# EAGLE board COM-TC (EAGLE 8.0.1)
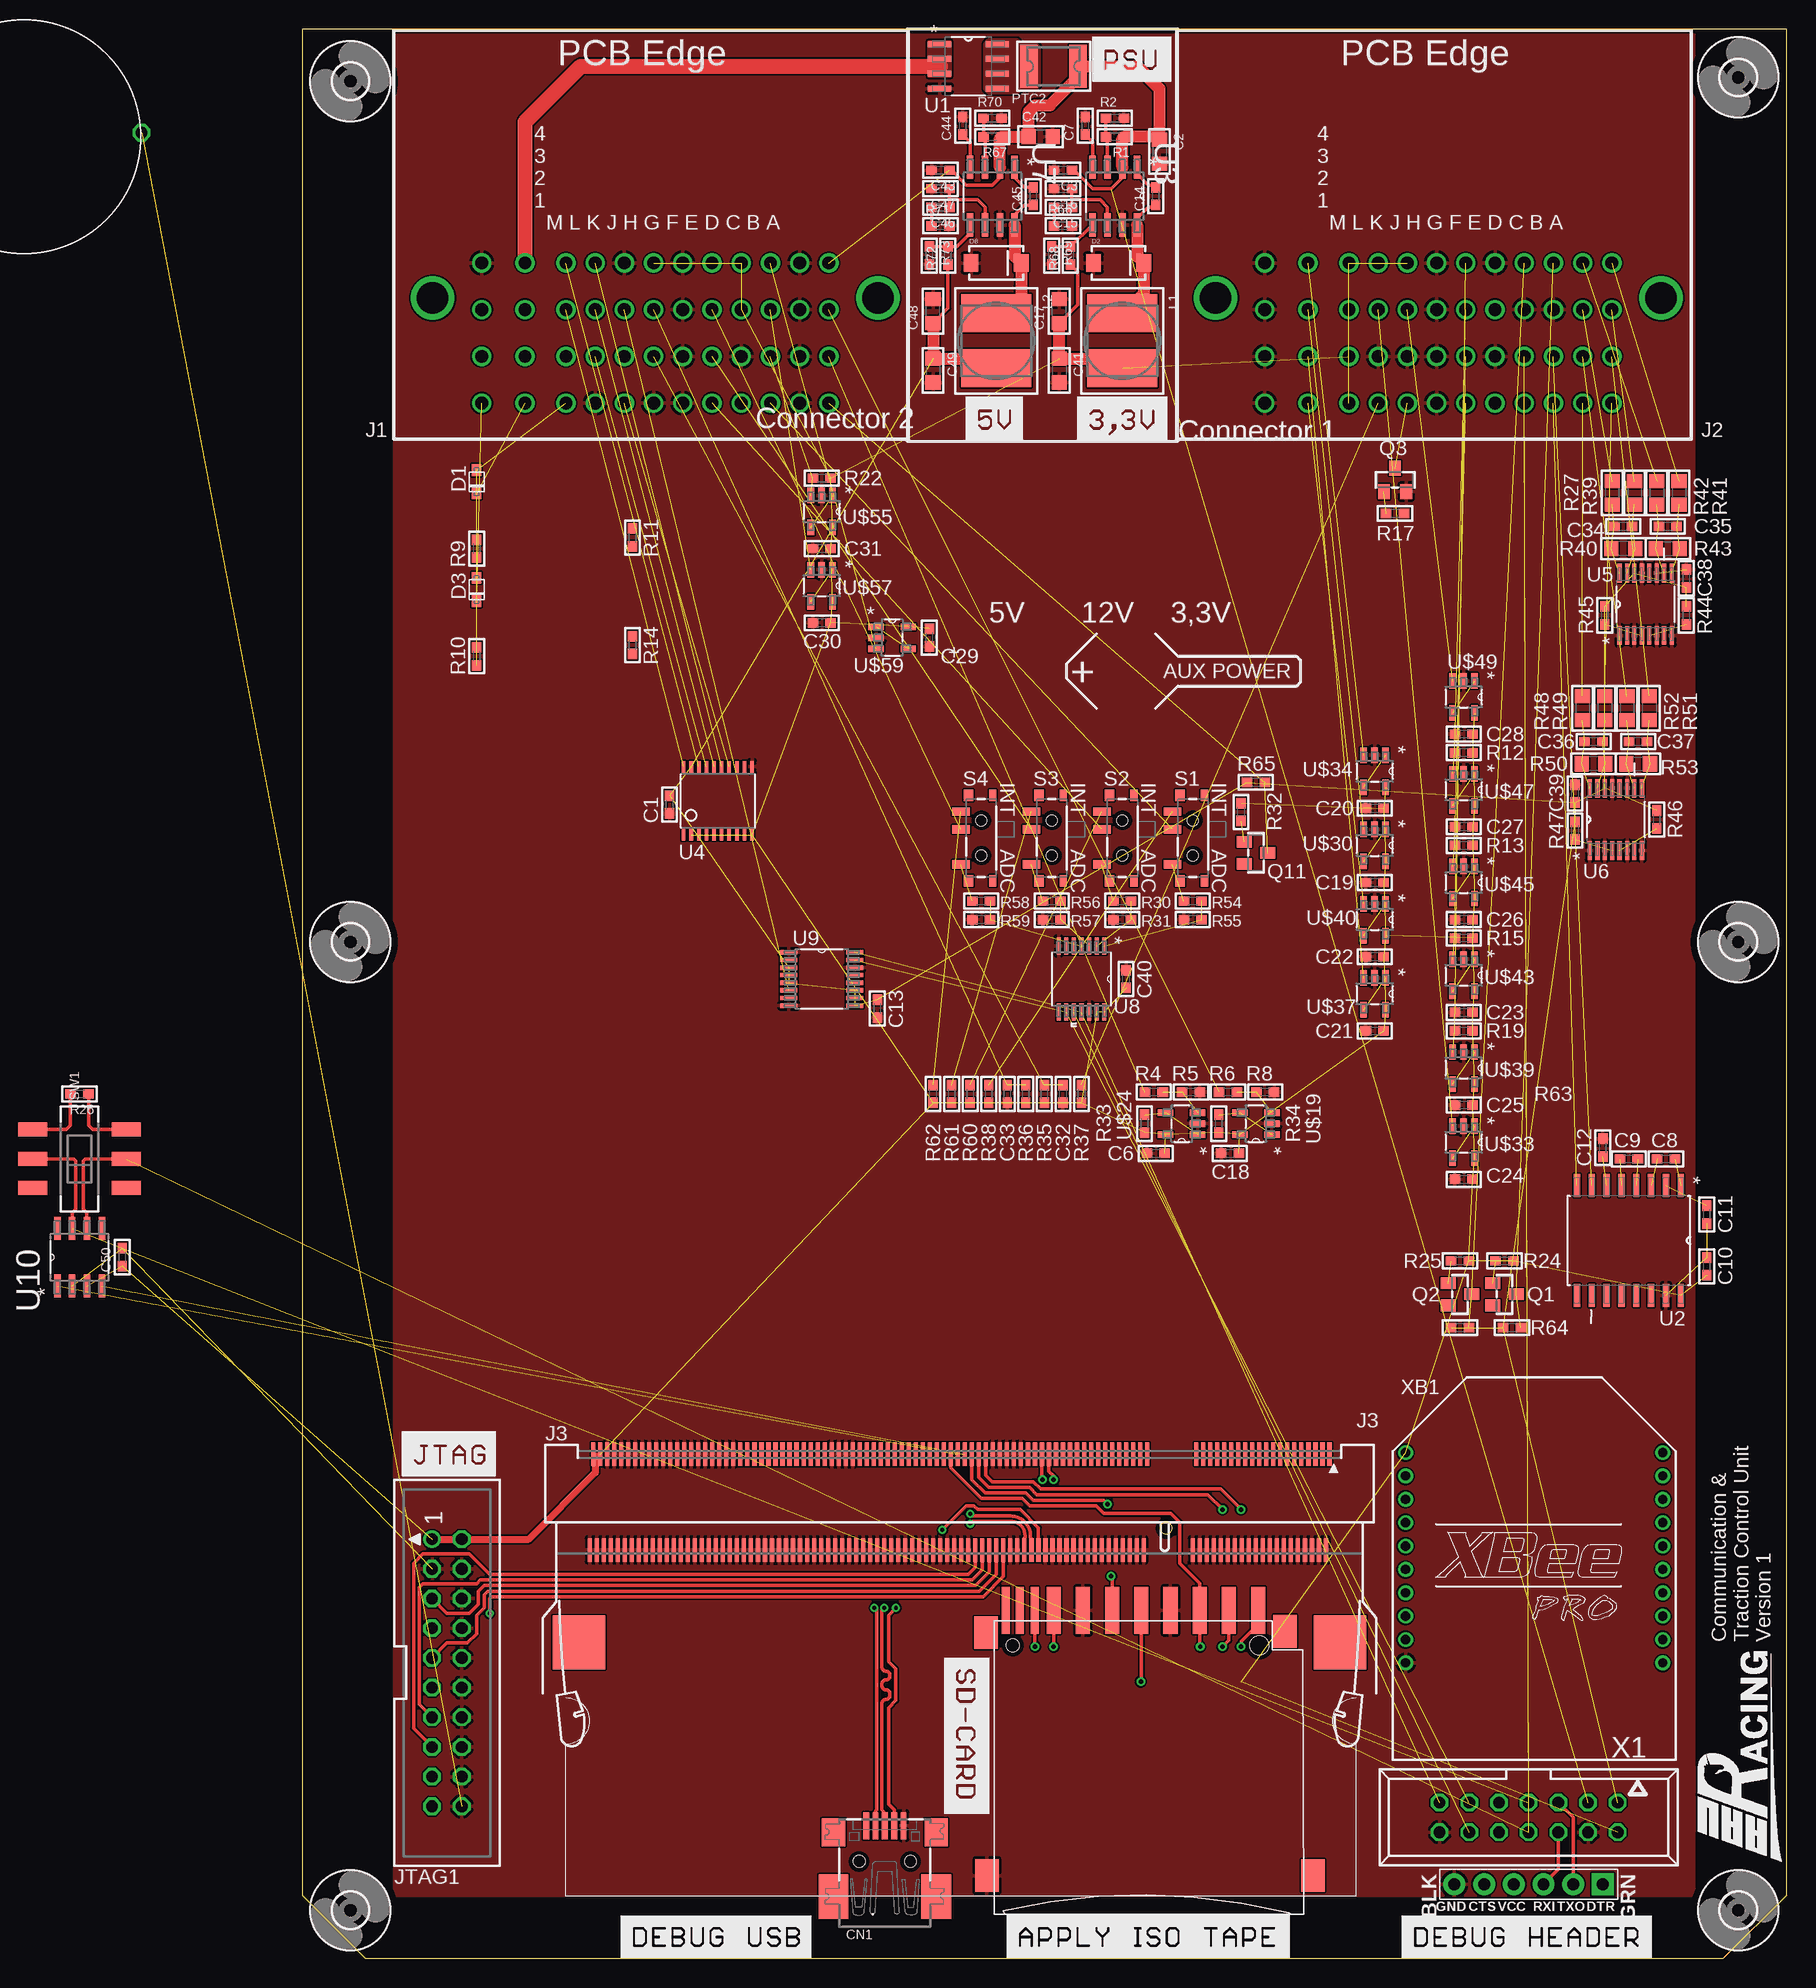
[diagram p0: board, top side]
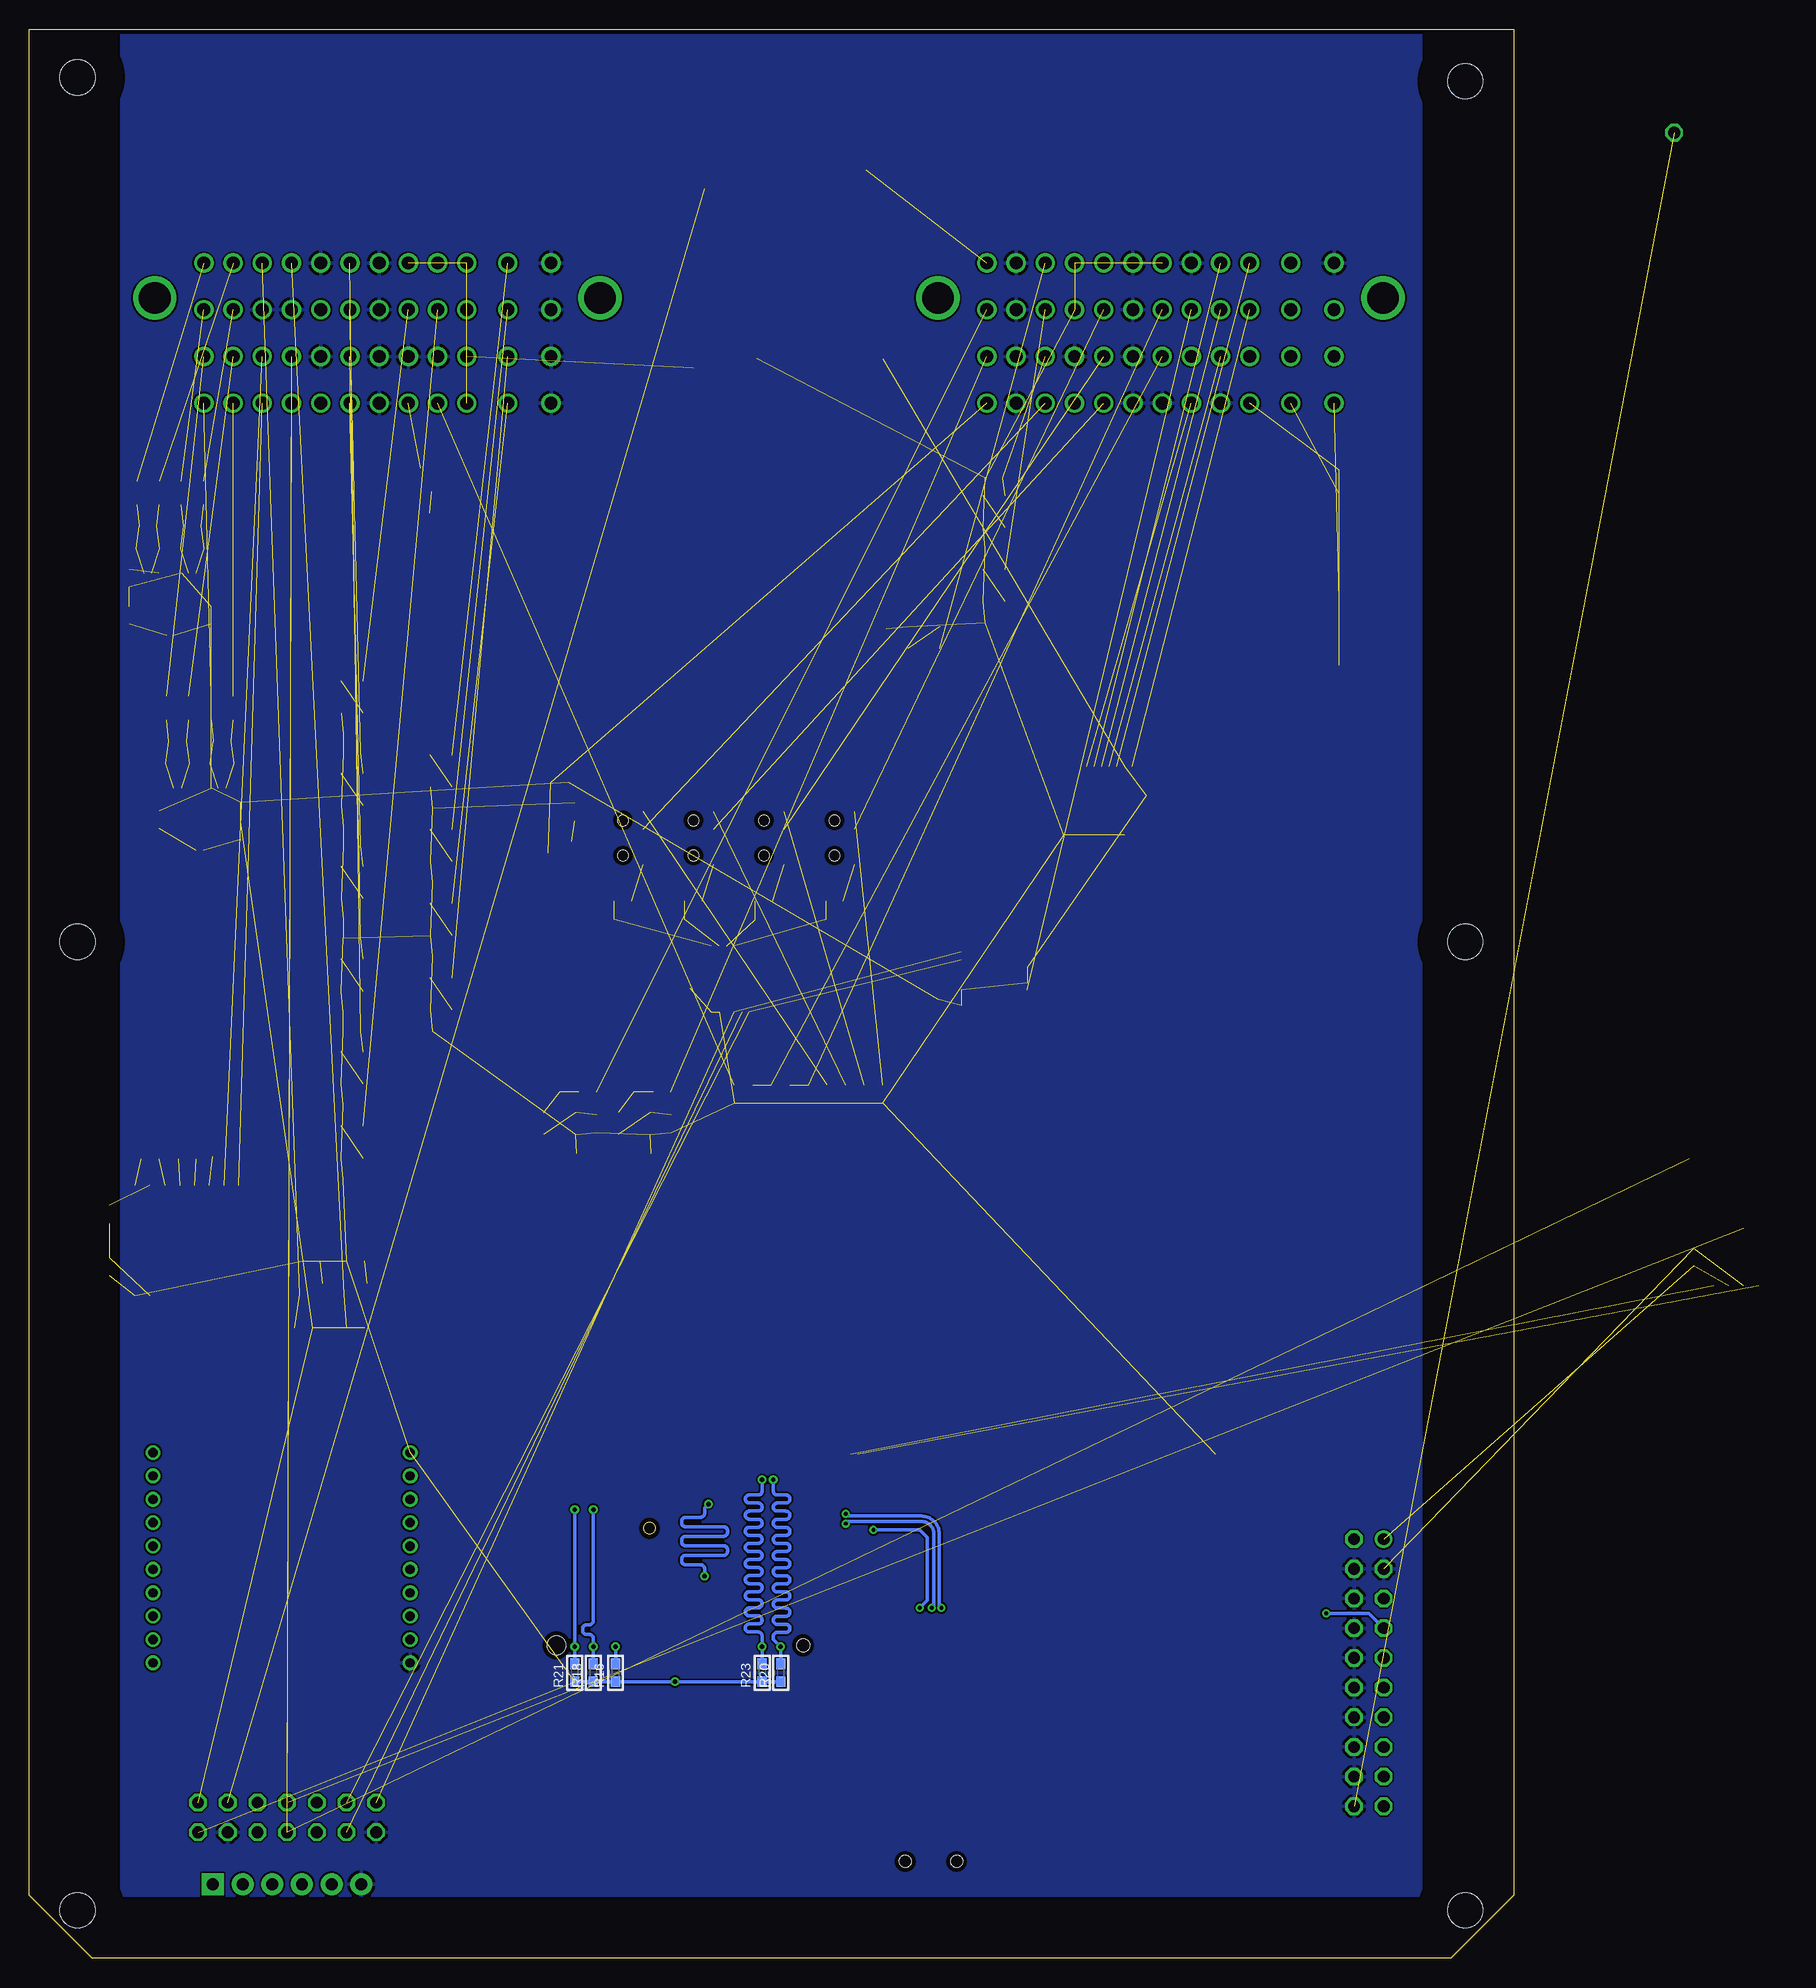
[diagram p1: board, bottom side, seen from below]

Size 127 x 165.1 mm. Coordinates in mm from the lower left corner, seen from the top.
Outline: 0,165.1 0,5.4 5.4,0 121.6,0 127,5.4 127,165.1 0,165.1
Copper layers (1*16): Top 0.0356mm / dielectric 1.5011mm / Bottom 0.0356mm
Design rules "LaenPCBOrder": minimum track width 6mil, minimum drill 13mil, track to track 6mil, track to pad 6mil, pad to pad 6mil, via to via 6mil, smd to smd 6mil, copper to edge 15mil, drill to drill 6mil, minimum pad ring 7mil, minimum via ring 7mil, stop-mask expansion 3mil, vias tented up to drill 0mil, thermal gap 10mil

## Footprints (pad centres in the part's own frame; a part is rotated, then mirrored left to right if it is on the bottom)
_0603 = smd 0.9 x 0.8: 1 -0.762,0; 2 0.762,0
_0805 = smd 1.2 x 1.3: 1 -1.016,0; 2 1.016,0
SUPERCAP = drill 1 octagon: P$1 -9.93,0.35; P$3 10.07,0.35
USB-MINIB_LARGER = smd 0.5 x 2.308: D+ 0,4.064; D- -0.8,4.064; GND 1.6,4.064; ID 0.8,4.064; VBUS -1.6,4.064 | smd 2.54 x 3.81: GND1 -4.4,-2; GND4 4.4,-2 | smd 2 x 2.4: GND2 -4.4,3.5; GND3 4.4,3.5 | hole 1: -2.2,1; 2.2,1
SOD-323F = smd 1 x 0.8: A -1,0; C 1,0
SMA-DIODE = smd 1.27 x 1.47: A -2.15,0; C 2.15,0
3,0 = hole 3: 0,0
AUTOCONNECTOR = drill 1.1: A1 15.22,-6.92; A2 15.22,-2.92; A3 15.22,1.08; A4 15.22,5.08; B1 12.72,-6.92; B2 12.72,-2.92; B3 12.72,1.08; B4 12.72,5.08; C1 10.22,-6.92; C2 10.22,-2.92; C3 10.22,1.08; C4 10.22,5.08; D1 7.72,-6.92; D2 7.72,-2.92; D3 7.72,1.08; D4 7.72,5.08; E1 5.22,-6.92; E2 5.22,-2.92; E3 5.22,1.08; E4 5.22,5.08; F1 2.72,-6.92; F2 2.72,-2.92; F3 2.72,1.08; F4 2.72,5.08; G1 0.22,-6.92; G2 0.22,-2.92; G3 0.22,1.08; G4 0.22,5.08; H1 -2.28,-6.92; H2 -2.28,-2.92; H3 -2.28,1.08; H4 -2.28,5.08; J1 -4.78,-6.92; J2 -4.78,-2.92; J3 -4.78,1.08; J4 -4.78,5.08; K1 -7.28,-6.92; K2 -7.28,-2.92; K3 -7.28,1.08; K4 -7.28,5.08; L1 -10.78,-6.92; L2 -10.78,-2.92; L3 -10.78,1.08; L4 -10.78,5.08; M1 -14.48,-6.92; M2 -14.48,-2.92; M3 -14.48,1.08; M4 -14.48,5.08 | drill 2.7: SHIELD1 19.42,2.08; SHIELD2 -18.68,2.08
SODIMM-CONNECTOR-2.5V = smd 0.35 x 2: 1 28.84,18.07; 2 28.54,9.87; 3 28.24,18.07; 4 27.94,9.87; 5 27.64,18.07; 6 27.34,9.87; 7 27.04,18.07; 8 26.74,9.87; 9 26.44,18.07; 10 26.14,9.87; 11 25.84,18.07; 12 25.54,9.87; 13 25.24,18.07; 14 24.94,9.87; 15 24.64,18.07; 16 24.34,9.87; 17 24.04,18.07; 18 23.74,9.87; 19 23.44,18.07; 20 23.14,9.87; 21 22.84,18.07; 22 22.54,9.87; 23 22.24,18.07; 24 21.94,9.87; 25 21.64,18.07; 26 21.34,9.87; 27 21.04,18.07; 28 20.74,9.87; 29 20.44,18.07; 30 20.14,9.87; 31 19.84,18.07; 32 19.54,9.87; 33 19.24,18.07; 34 18.94,9.87; 35 18.64,18.07; 36 18.34,9.87; 37 18.04,18.07; 38 17.74,9.87; 39 17.44,18.07; 40 17.14,9.87; 41 13.24,18.07; 42 12.94,9.87; 43 12.64,18.07; 44 12.34,9.87; 45 12.04,18.07; 46 11.74,9.87; 47 11.44,18.07; 48 11.14,9.87; 49 10.84,18.07; 50 10.54,9.87; 51 10.24,18.07; 52 9.94,9.87; 53 9.64,18.07; 54 9.34,9.87; 55 9.04,18.07; 56 8.74,9.87; 57 8.44,18.07; 58 8.14,9.87; 59 7.84,18.07; 60 7.54,9.87; 61 7.24,18.07; 62 6.94,9.87; 63 6.64,18.07; 64 6.34,9.87; 65 6.04,18.07; 66 5.74,9.87; 67 5.44,18.07; 68 5.14,9.87; 69 4.84,18.07; 70 4.54,9.87; 71 4.24,18.07; 72 3.94,9.87; 73 3.64,18.07; 74 3.34,9.87; 75 3.04,18.07; 76 2.74,9.87; 77 2.44,18.07; 78 2.14,9.87; 79 1.84,18.07; 80 1.54,9.87; 81 1.24,18.07; 82 0.94,9.87; 83 0.64,18.07; 84 0.34,9.87; 85 0.04,18.07; 86 -0.26,9.87; 87 -0.56,18.07; 88 -0.86,9.87; 89 -1.16,18.07; 90 -1.46,9.87; 91 -1.76,18.07; 92 -2.06,9.87; 93 -2.36,18.07; 94 -2.66,9.87; 95 -2.96,18.07; 96 -3.26,9.87; 97 -3.56,18.07; 98 -3.86,9.87; 99 -4.16,18.07; 100 -4.46,9.87; 101 -4.76,18.07; 102 -5.06,9.87; 103 -5.36,18.07; 104 -5.66,9.87; 105 -5.96,18.07; 106 -6.26,9.87; 107 -6.56,18.07; 108 -6.86,9.87; 109 -7.16,18.07; 110 -7.46,9.87; 111 -7.76,18.07; 112 -8.06,9.87; 113 -8.36,18.07; 114 -8.66,9.87; 115 -8.96,18.07; 116 -9.26,9.87; 117 -9.56,18.07; 118 -9.86,9.87; 119 -10.16,18.07; 120 -10.46,9.87; 121 -10.76,18.07; 122 -11.06,9.87; 123 -11.36,18.07; 124 -11.66,9.87; 125 -11.96,18.07; 126 -12.26,9.87; 127 -12.56,18.07; 128 -12.86,9.87; 129 -13.16,18.07; 130 -13.46,9.87; 131 -13.76,18.07; 132 -14.06,9.87; 133 -14.36,18.07; 134 -14.66,9.87; 135 -14.96,18.07; 136 -15.26,9.87; 137 -15.56,18.07; 138 -15.86,9.87; 139 -16.16,18.07; 140 -16.46,9.87; 141 -16.76,18.07; 142 -17.06,9.87; 143 -17.36,18.07; 144 -17.66,9.87; 145 -17.96,18.07; 146 -18.26,9.87; 147 -18.56,18.07; 148 -18.86,9.87; 149 -19.16,18.07; 150 -19.46,9.87; 151 -19.76,18.07; 152 -20.06,9.87; 153 -20.36,18.07; 154 -20.66,9.87; 155 -20.96,18.07; 156 -21.26,9.87; 157 -21.56,18.07; 158 -21.86,9.87; 159 -22.16,18.07; 160 -22.46,9.87; 161 -22.76,18.07; 162 -23.06,9.87; 163 -23.36,18.07; 164 -23.66,9.87; 165 -23.96,18.07; 166 -24.26,9.87; 167 -24.56,18.07; 168 -24.86,9.87; 169 -25.16,18.07; 170 -25.46,9.87; 171 -25.76,18.07; 172 -26.06,9.87; 173 -26.36,18.07; 174 -26.66,9.87; 175 -26.96,18.07; 176 -27.26,9.87; 177 -27.56,18.07; 178 -27.86,9.87; 179 -28.16,18.07; 180 -28.46,9.87; 181 -28.76,18.07; 182 -29.06,9.87; 183 -29.36,18.07; 184 -29.66,9.87; 185 -29.96,18.07; 186 -30.26,9.87; 187 -30.56,18.07; 188 -30.86,9.87; 189 -31.16,18.07; 190 -31.46,9.87; 191 -31.76,18.07; 192 -32.06,9.87; 193 -32.36,18.07; 194 -32.66,9.87; 195 -32.96,18.07; 196 -33.26,9.87; 197 -33.56,18.07; 198 -33.86,9.87; 199 -34.16,18.07; 200 -34.46,9.87 | smd 4.5 x 4.6: M1 29.74,1.97; M2 -35.36,1.97
FTDI_DEVICE_SIDE = drill 1.016 pad 1.88 square: P$1 -6.35,0 | drill 1.016 pad 1.88: P$2 -3.81,0; P$3 -1.27,0; P$4 1.27,0; P$5 3.81,0; P$6 6.35,0
JTAG-ARM = drill 1: 1 -11.43,-1.27 | drill 1 octagon: 2 -11.43,1.27; 3 -8.89,-1.27; 4 -8.89,1.27; 5 -6.35,-1.27; 6 -6.35,1.27; 7 -3.81,-1.27; 8 -3.81,1.27; 9 -1.27,-1.27; 10 -1.27,1.27; 11 1.27,-1.27; 12 1.27,1.27; 13 3.81,-1.27; 14 3.81,1.27; 15 6.35,-1.27; 16 6.35,1.27; 17 8.89,-1.27; 18 8.89,1.27; 19 11.43,-1.27; 20 11.43,1.27
INDUCTOR_6X6MM_TDK_VLC6045 = smd 3.25 x 6: P$1 -2.35,0; P$2 2.35,0
PTC1812 = smd 1.5 x 3.7: P$1 -2.1,0; P$2 2.1,0
SOT23-WIDE = smd 1 x 1.27: 1 -0.95,-1; 2 0.95,-1; 3 0,1
SWITCH-SPST-SMD-A = smd 0.7 x 1.5: 1 -2.25,-1.75; 2 -0.75,-1.75; 3 2.25,-1.75 | smd 1 x 0.6: GND1 -3.65,1; GND3 3.65,1 | smd 1 x 0.8: GND2 -3.65,-1.1; GND4 3.65,-1.1 | hole 0.9: -1.5,0; 1.5,0
DPDT_SMT_JS202011SCQN = smd 1.2 x 2.5: P$1 -2.5,-4; P$2 0,-4; P$3 2.5,-4; P$4 2.5,4; P$5 0,4; P$6 -2.5,4
SOIC127P600X175-8N = smd 1.981 x 0.508: 1 -2.464,1.905; 2 -2.464,0.635; 3 -2.464,-0.635; 4 -2.464,-1.905; 5 2.464,-1.905; 6 2.464,-0.635; 7 2.464,0.635; 8 2.464,1.905
SOIC127P1032X265-16N = smd 1.981 x 0.533: 1 -4.699,4.445; 2 -4.699,3.175; 3 -4.699,1.905; 4 -4.699,0.635; 5 -4.699,-0.635; 6 -4.699,-1.905; 7 -4.699,-3.175; 8 -4.699,-4.445; 9 4.699,-4.445; 10 4.699,-3.175; 11 4.699,-1.905; 12 4.699,-0.635; 13 4.699,0.635; 14 4.699,1.905; 15 4.699,3.175; 16 4.699,4.445
SOIC127P600X175-8N' = smd 1.981 x 0.559: 1 -2.464,1.905; 2 -2.464,0.635; 3 -2.464,-0.635; 4 -2.464,-1.905; 5 2.464,-1.905; 6 2.464,-0.635; 7 2.464,0.635; 8 2.464,1.905
TSSOP20 = smd 0.305 x 0.991: 1 -2.925,-2.918; 2 -2.275,-2.918; 3 -1.625,-2.918; 4 -0.975,-2.918; 5 -0.325,-2.918; 6 0.325,-2.918; 7 0.975,-2.918; 8 1.625,-2.918; 9 2.275,-2.918; 10 2.925,-2.918; 11 2.925,2.918; 12 2.275,2.918; 13 1.625,2.918; 14 0.975,2.918; 15 0.325,2.918; 16 -0.325,2.918; 17 -0.975,2.918; 18 -1.625,2.918; 19 -2.275,2.918; 20 -2.925,2.918
SOP63P600X175-16N = smd 1.6 x 0.356: 1 -2.667,2.235; 2 -2.667,1.575; 3 -2.667,0.965; 4 -2.667,0.305; 5 -2.667,-0.305; 6 -2.667,-0.965; 7 -2.667,-1.575; 8 -2.667,-2.235; 9 2.667,-2.235; 10 2.667,-1.575; 11 2.667,-0.965; 12 2.667,-0.305; 13 2.667,0.305; 14 2.667,0.965; 15 2.667,1.575; 16 2.667,2.235
SOP65P640X120-14N = smd 1.473 x 0.356: 1 -2.819,1.956; 2 -2.819,1.295; 3 -2.819,0.66; 4 -2.819,0; 5 -2.819,-0.66; 6 -2.819,-1.295; 7 -2.819,-1.956; 8 2.819,-1.956; 9 2.819,-1.295; 10 2.819,-0.66; 11 2.819,0; 12 2.819,0.66; 13 2.819,1.295; 14 2.819,1.956
SOP65P640X120-16N = smd 1.473 x 0.356: 1 -2.819,2.286; 2 -2.819,1.626; 3 -2.819,0.965; 4 -2.819,0.33; 5 -2.819,-0.33; 6 -2.819,-0.965; 7 -2.819,-1.626; 8 -2.819,-2.286; 9 2.819,-2.286; 10 2.819,-1.626; 11 2.819,-0.965; 12 2.819,-0.33; 13 2.819,0.33; 14 2.819,0.965; 15 2.819,1.626; 16 2.819,2.286
06132 = smd 1.2 x 4: 1 6.9,0.9; 2 4.4,0.9; 3 1.9,0.9; 4 -0.6,0.9; 5 -3.1,0.9; 6 -5.6,0.9; 7 -8.1,0.9; 9 9.4,0.9 | smd 0.7 x 4: 8 -9.7,0.9; CD -11,0.9; WP -12.2,0.9 | smd 2 x 2.8: GP -13.8,-21.8; GP2 14.1,-21.8; GP3 11.7,-0.9; GP4 -13.9,-1 | hole 1.1: -11.6,-2.1 | hole 1.6: 9.5,-2.1
SOT95P270X145-5N = smd 1.321 x 0.559: 1 -1.372,0.94; 2 -1.372,0; 3 -1.372,-0.94; 4 1.372,-0.94; 5 1.372,0.94
057-014-1 = drill 1 octagon: 1 -7.62,-1.27; 2 -7.62,1.27; 3 -5.08,-1.27; 4 -5.08,1.27; 5 -2.54,-1.27; 6 -2.54,1.27; 7 0,-1.27; 8 0,1.27; 9 2.54,-1.27; 10 2.54,1.27; 11 5.08,-1.27; 12 5.08,1.27; 13 7.62,-1.27; 14 7.62,1.27
XBEE-PRO = drill 0.8 pad 1.27: 1 -11,9; 2 -11,7; 3 -11,5; 4 -11,3; 5 -11,1; 6 -11,-1; 7 -11,-3; 8 -11,-5; 9 -11,-7; 10 -11,-9; 11 11,-9; 12 11,-7; 13 11,-5; 14 11,-3; 15 11,-1; 16 11,1; 17 11,3; 18 11,5; 19 11,7; 20 11,9

## Placement (x,y rotation side)
C1  100n  [_0603]  31.43,98.74 90 top
C2  4,7u  [_0805]  73.34,154.62 270 top
C3  10n  [_0603]  65.09,153.03 180 top
C4  SUPERCAP  [SUPERCAP]  -23.81,155.89 0 top  (outside the outline)
C6  100n  [_0603]  73.03,68.9 0 top
C7  10n  [_0603]  66.99,156.84 90 top
C8  100n  [_0603]  116.68,68.42 180 top
C9  100n  [_0603]  113.51,68.42 180 top
C10  100n  [_0603]  120.17,59.21 270 top
C11  100n  [_0603]  120.17,63.66 270 top
C12  100n  [_0603]  111.28,69.37 270 top
C13  100n  [_0603]  49.21,81.28 270 top
C14  100n  [_0603]  73.03,150.81 90 top
C15  1n  [_0603]  65.09,149.86 180 top
C16  47p  [_0603]  65.09,151.45 180 top
C17  47u  [_0805]  64.77,140.97 90 top
C18  100n  [_0603]  79.38,68.9 0 top
C19  100n  [_0603]  91.76,92.08 0 top
C20  100n  [_0603]  91.76,98.42 0 top
C21  100n  [_0603]  91.76,79.38 0 top
C22  100n  [_0603]  91.76,85.72 0 top
C23  100n  [_0603]  99.38,80.96 0 top
C24  100n  [_0603]  99.38,66.67 0 top
C25  100n  [_0603]  99.38,73.03 0 top
C26  100n  [_0603]  99.38,88.9 0 top
C27  100n  [_0603]  99.38,96.84 0 top
C28  100n  [_0603]  99.38,104.78 0 top
C29  100n  [_0603]  53.66,113.03 90 top
C30  100n  [_0603]  44.45,114.3 0 top
C31  100n  [_0603]  44.45,120.65 0 top
C32  10n  [_0603]  65.09,73.98 270 top
C33  10n  [_0603]  60.33,73.98 270 top
C34  1n  [_0603]  113.03,122.56 0 top
C35  1n  [_0603]  116.84,122.56 180 top
C36  1n  [_0603]  110.49,104.14 0 top
C37  1n  [_0603]  114.3,104.14 180 top
C38  100n  [_0603]  118.43,118.11 90 top
C39  100n  [_0603]  108.9,99.69 90 top
C40  100n  [_0603]  70.48,83.82 90 top
C41  47u  [_0805]  64.77,135.89 270 top
C42  4,7u  [_0805]  63.18,155.89 0 top
C43  10n  [_0603]  54.61,153.03 180 top
C44  10n  [_0603]  56.52,156.84 90 top
C45  100n  [_0603]  62.55,150.81 90 top
C46  1n  [_0603]  54.61,149.86 180 top
C47  47p  [_0603]  54.61,151.45 180 top
C48  47u  [_0805]  53.98,140.97 90 top
C49  47u  [_0805]  53.98,135.89 270 top
C50  100n  [_0603]  -15.4,60.01 90 top  (outside the outline)
CN1  [USB-MINIB_LARGER]  49.85,7.3 0 top
D1  [SOD-323F]  14.92,126.36 270 top
D2  BA340A  [SMA-DIODE]  69.85,145.1 0 top
D3  [SOD-323F]  14.92,117.16 270 top
D8  BA340A  [SMA-DIODE]  59.37,145.1 0 top
H1  MOUNT-HOLE3.0  [3,0]  4.13,160.66 0 top
H2  MOUNT-HOLE3.0  [3,0]  4.13,87 0 top
H3  MOUNT-HOLE3.0  [3,0]  4.13,4.13 0 top
H4  MOUNT-HOLE3.0  [3,0]  122.87,4.13 0 top
H5  MOUNT-HOLE3.0  [3,0]  122.87,160.97 0 top
H6  MOUNT-HOLE3.0  [3,0]  122.87,87 0 top
J1  CON1  [AUTOCONNECTOR]  29.84,140.02 0 top
J2  CON1  [AUTOCONNECTOR]  96.84,140.02 0 top
J3  SO-DIMM-CPU  [SODIMM-CONNECTOR-2.5V]  59.05,25.08 0 top
J4  FTDI_DEVICE  [FTDI_DEVICE_SIDE]  104.93,6.35 180 top
JTAG1  JTAG-ARM  [JTAG-ARM]  12.38,24.45 270 top
L1  SRN6045TA-680M  [INDUCTOR_6X6MM_TDK_VLC6045]  70.17,138.43 270 top
L2  SRN6045TA-680M  [INDUCTOR_6X6MM_TDK_VLC6045]  59.37,138.43 270 top
PTC2  [PTC1812]  64.29,161.93 180 top
Q1  [SOT23-WIDE]  102.87,56.83 270 top
Q2  [SOT23-WIDE]  99.06,56.83 270 top
Q3  [SOT23-WIDE]  93.5,126.52 0 top
Q11  [SOT23-WIDE]  81.6,94.61 270 top
R1  332k  [_0603]  69.53,155.89 180 top
R2  68k1  [_0603]  69.53,157.48 0 top
R4  499  [_0603]  72.87,74.14 180 top
R5  976  [_0603]  76.04,74.14 180 top
R6  499  [_0603]  79.22,74.14 180 top
R8  976  [_0603]  82.39,74.14 180 top
R9  500  [_0603]  14.92,120.65 270 top
R10  500  [_0603]  14.92,111.44 270 top
R11  120  [_0603]  28.26,121.6 270 top
R12  10k  [_0603]  99.38,103.19 180 top
R13  10k  [_0603]  99.38,95.25 180 top
R14  120  [_0603]  28.26,112.39 270 top
R15  10k  [_0603]  99.38,87.31 180 top
R16  4k7  [_0603]  76.83,24.45 90 bottom
R17  500  [_0603]  93.5,123.67 0 top
R18  4k7  [_0603]  78.74,24.45 90 bottom
R19  10k  [_0603]  99.38,79.38 180 top
R20  4k7  [_0603]  62.71,24.45 90 bottom
R21  4k7  [_0603]  80.33,24.45 90 bottom
R22  10k  [_0603]  44.45,126.68 180 top
R23  4k7  [_0603]  64.29,24.45 90 bottom
R24  500  [_0603]  102.87,59.69 180 top
R25  500  [_0603]  99.06,59.69 180 top
R26  60  [_0603]  -19.05,73.98 180 top  (outside the outline)
R27  10k 0W5  [_0805]  112.08,125.41 270 top
R30  499  [_0603]  70.17,90.49 180 top
R31  976  [_0603]  70.17,88.9 0 top
R32  500  [_0603]  80.33,98.11 270 top
R33  10k  [_0603]  72.07,71.44 270 top
R34  10k  [_0603]  78.42,71.44 270 top
R35  10k  [_0603]  63.5,73.98 90 top
R36  10k  [_0603]  61.91,73.98 90 top
R37  10k  [_0603]  66.67,73.98 90 top
R38  10k  [_0603]  58.74,73.98 90 top
R39  10k 0W5  [_0805]  113.98,125.41 270 top
R40  [_0805]  113.03,120.65 180 top
R41  10k 0W5  [_0805]  117.79,125.41 270 top
R42  10k 0W5  [_0805]  115.89,125.41 270 top
R43  [_0805]  116.84,120.65 0 top
R44  1k  [_0603]  118.43,114.94 90 top
R45  1k  [_0603]  111.44,114.94 90 top
R46  1k  [_0603]  115.89,97.47 90 top
R47  1k  [_0603]  108.9,96.52 90 top
R48  10k 0W5  [_0805]  109.54,107 270 top
R49  10k 0W5  [_0805]  111.44,107 270 top
R50  [_0805]  110.49,102.23 180 top
R51  10k 0W5  [_0805]  115.25,107 270 top
R52  10k 0W5  [_0805]  113.35,107 270 top
R53  [_0805]  114.3,102.23 0 top
R54  499  [_0603]  76.2,90.49 180 top
R55  976  [_0603]  76.2,88.9 0 top
R56  499  [_0603]  64.14,90.49 180 top
R57  976  [_0603]  64.14,88.9 0 top
R58  499  [_0603]  58.1,90.49 180 top
R59  976  [_0603]  58.1,88.9 0 top
R60  10k  [_0603]  57.15,73.98 90 top
R61  10k  [_0603]  55.56,73.98 90 top
R62  10k  [_0603]  53.98,73.98 90 top
R63  500  [_0603]  99.06,53.98 0 top
R64  500  [_0603]  103.5,53.98 0 top
R65  500  [_0603]  81.6,100.65 0 top
R66  29k4  [_0603]  65.09,148.27 0 top
R67  332k  [_0603]  59.05,155.89 180 top
R68  10k2  [_0603]  65.72,145.73 90 top
R69  3k24  [_0603]  64.14,145.73 270 top
R70  68k1  [_0603]  59.05,157.48 0 top
R71  29k4  [_0603]  54.61,148.27 0 top
R72  10k2  [_0603]  55.24,145.73 90 top
R73  1k91  [_0603]  53.66,145.73 270 top
S1  [SWITCH-SPST-SMD-A]  76.2,95.89 270 top
S2  [SWITCH-SPST-SMD-A]  70.17,95.89 270 top
S3  [SWITCH-SPST-SMD-A]  64.14,95.89 270 top
S4  [SWITCH-SPST-SMD-A]  58.1,95.89 270 top
SW1  [DPDT_SMT_JS202011SCQN]  -19.05,68.42 90 top  (outside the outline)
U1  IRF9332PBF  [SOIC127P600X175-8N]  56.99,161.93 0 top
U2  MAX232AEWE+  [SOIC127P1032X265-16N]  113.51,61.44 270 top
U3  TPS54331D  [SOIC127P600X175-8N']  69.53,150.81 270 top
U4  [TSSOP20]  35.56,99.06 0 top
U5  MAX9926  [SOP63P600X175-16N]  114.94,115.89 90 top
U6  MAX9926  [SOP63P600X175-16N]  112.39,97.47 90 top
U7  TPS54331D  [SOIC127P600X175-8N']  59.05,150.81 270 top
U8  MCP3004-I/ST  [SOP65P640X120-14N]  66.67,83.82 270 top
U9  AD5024BRUZ  [SOP65P640X120-16N]  44.45,83.82 0 top
U10  SN65HVD232D  [SOIC127P600X175-8N']  -19.05,60.01 90 top  (outside the outline)
U$1  SDMMC06132  [06132]  72.39,28.89 0 top
U$19  MCP6001T-E/OT  [SOT95P270X145-5N]  81.6,71.44 180 top
U$24  MCP6001T-E/OT  [SOT95P270X145-5N]  75.25,71.44 180 top
U$30  MCP6001T-E/OT  [SOT95P270X145-5N]  91.76,95.25 270 top
U$33  MCP6001T-E/OT  [SOT95P270X145-5N]  99.38,69.85 270 top
U$34  MCP6001T-E/OT  [SOT95P270X145-5N]  91.76,101.6 270 top
U$37  MCP6001T-E/OT  [SOT95P270X145-5N]  91.76,82.55 270 top
U$39  MCP6001T-E/OT  [SOT95P270X145-5N]  99.38,76.2 270 top
U$40  MCP6001T-E/OT  [SOT95P270X145-5N]  91.76,88.9 270 top
U$43  MCP6001T-E/OT  [SOT95P270X145-5N]  99.38,84.14 270 top
U$45  MCP6001T-E/OT  [SOT95P270X145-5N]  99.38,92.08 270 top
U$47  MCP6001T-E/OT  [SOT95P270X145-5N]  99.38,100.01 270 top
U$49  MCP6001T-E/OT  [SOT95P270X145-5N]  99.38,107.95 270 top
U$55  MCP6001T-E/OT  [SOT95P270X145-5N]  44.45,123.83 270 top
U$57  MCP6001T-E/OT  [SOT95P270X145-5N]  44.45,117.47 270 top
U$59  MCP6001T-E/OT  [SOT95P270X145-5N]  50.48,113.03 0 top
X1  057-014-1  [057-014-1]  104.93,12.06 180 top
XB1  XBEE-PRO  [XBEE-PRO]  105.41,34.29 0 top

## Library data of the parts
C1-C3 C6-C50 CN1 JTAG1 L1 L2 PTC2 Q1-Q3 Q11 R1 R2 R4-R6 R8-R27 R30-R73 SW1 = microbuilder
C4 J1 J2 = unicorn_v2
D1 D3 U4 U$1 = adafruit
D2 D8 = SparkFun-DiscreteSemi; PROD_ID: DIO-09886
H1-H6 = holes
J3 = AAU-Racing
J4 = SparkFun-Connectors
S1-S4 = SparkFun-Electromechanical; PROD_ID: SWCH-10651
U1 = International_Rectifier_By_element14_Batch_1; MPN: IRF9332PBF; OC_FARNELL: 1857354; OC_NEWARK: 12T9892; PACKAGE: SOIC-8; SUPPLIER: INTERNATIONAL RECTIFIER
U2 = Maxim_By_element14_Batch_1; MPN: MAX232AEWE+; OC_FARNELL: 9724400; OC_NEWARK: 67K4435; PACKAGE: SOIC-16; SUPPLIER: Maxim
U3 U7 = Texas Instruments_By_element14_Batch_1; MPN: TPS54331D; OC_FARNELL: 1645383; OC_NEWARK: 03P1641; PACKAGE: SOIC-8; SUPPLIER: TI
U5 U6 = Maxim_By_element14_Batch_1; MPN: MAX9927AEE+; OC_FARNELL: 1845723; OC_NEWARK: 80P4723; PACKAGE: QSOP-16; SUPPLIER: Maxim
U8 = Microchip_By_element14_Batch_1; MPN: MCP3004-I/ST; OC_FARNELL: 1523365; OC_NEWARK: 74M3032; PACKAGE: 14TSSOP; SUPPLIER: Microchip
U9 = AAU-Racing; MPN: AD5024BRUZ; OC_FARNELL: 2067817; OC_NEWARK: 07P8929; PACKAGE: TSSOP-16; SUPPLIER: Analog Devices
U10 = Texas Instruments_By_element14_Batch_1; MPN: SN65HVD232D; OC_FARNELL: 1103107; OC_NEWARK: 35K4890; PACKAGE: SOIC-8; SUPPLIER: Texas Instruments
U$19 U$24 U$30 U$33 U$34 U$37 U$39 U$40 U$43 U$45 U$47 U$49 U$55 U$57 U$59 = Microchip_By_element14_Batch_1; MPN: MCP6001T-E/OT; OC_FARNELL: 1332116; OC_NEWARK: 34M7471; PACKAGE: SOT23-5; SUPPLIER: Microchip
X1 = con-panduit
XB1 = maxstream; MPN: XBP24-AWI-001; OC_FARNELL: 1337916; OC_NEWARK: 42M2667

## Nets
3.3V: C6.2 C10.2 C17.1 C18.2 C19.2 C20.2 C21.2 C22.2 C23.2 C24.2 C25.2 C26.2 C27.2 C28.2 C29.2 C30.2 C31.2 C40.1 C41.1 C50.1 J1.D3 J1.D4 J1.G4 J2.H4 J2.J4 J2.K1 J2.K2 J2.K3 J2.K4 J3.197 J3.199 JTAG1.1 JTAG1.2 L1.P$2 R12.1 R13.1 R15.1 R16.1 R18.1 R19.1 R20.1 R21.1 R22.1 R23.1 R24.1 R25.1 R32.1 R33.2 R34.2 R35.1 R36.1 R37.1 R38.1 R60.1 R61.1 R62.1 R68.1 U2.16 U4.2 U4.10 U8.13 U8.14 U10.3 U$1.4 U$19.5 U$24.5 U$30.5 U$33.5 U$34.5 U$37.5 U$39.5 U$40.5 U$43.5 U$45.5 U$47.5 U$49.5 U$55.5 U$57.5 U$59.5 X1.2 XB1.1
5.0V: C1.2 C13.1 C38.1 C39.1 C48.1 C49.1 L2.P$2 R44.2 R45.2 R46.2 R47.2 R63.1 R64.1 R65.1 R72.1 U4.19 U5.14 U6.14 U9.3 U9.4 U9.5 U9.9 U9.11 X1.1
12V: C2.1 C3.1 C42.1 C43.1 J1.A4 PTC2.P$1 R1.1 R67.1 U3.2 U7.2 X1.3
_N: CN1.D- J3.74
_P: CN1.D+ J3.76
ADC_CS: U8.8
AUX2: J1.E1 S2.2
AUX2I: R60.2 S2.1
AUX3: J1.E2 S3.2
AUX3I: R61.2 S3.1
AUX4: J1.E3 S4.2
AUX4I: R62.2 S4.1
AUX5: J1.E4
AUX6: J2.E1
AUX7: J2.E3
BITE: J1.A1 Q11.3 R65.2
BITEL: Q11.2
BRAKE-POT: J1.C3 U$57.3
BRAKE-POTB: U$57.1 U$57.4
BRAKEP: J2.F4 R19.2 U$39.3
BRAKEP2: J2.F2 R15.2 U$43.3
BRAKEP2B: U$43.1 U$43.4
BRAKEPB: U$39.1 U$39.4
CAN_RX: J3.93 U10.4
CAN_TX: J3.95 U10.1
CANH: J2.D2 SW1.P$5 U10.7 X1.7
CANL: J2.D1 SW1.P$2 U10.6 X1.8
CLUTCH-POT: J1.C4 U$59.3
CLUTCH-POTB: U$59.1 U$59.4
COMRX: U2.9
COMTX: U2.10
DACCLR: U9.10
DACCS: U9.2
DBG_RX: J4.P$3 X1.6
DBG_TX: J4.P$2 X1.5
ECU1: J2.C4 Q1.3 R64.2
ECU1L: Q1.2
ECU2: J2.D4 Q2.3 R63.2
ECU2L: Q2.2
ENCODER1: C32.1 J1.G2 R35.2
ENCODER2: C33.1 J1.G3 R36.2
FUELTEMP: J1.C2 R22.2 U$55.3
FUELTEMPB: U$55.1 U$55.4
GEARPOSAN: J2.H3 U$49.3
GEARPOSANB: U$49.1 U$49.4
GND: C1.1 C2.2 C3.2 C4.P$3 C6.1 C7.2 C10.1 C11.2 C12.1 C13.2 C16.2 C17.2 C18.1 C19.1 C20.1 C21.1 C22.1 C23.1 C24.1 C25.1 C26.1 C27.1 C28.1 C29.1 C30.1 C31.1 C32.2 C33.2 C38.2 C39.2 C40.2 C41.2 C42.2 C43.2 C44.2 C47.2 C48.2 C49.2 C50.2 CN1.GND D2.A D8.A J1.B1 J1.B2 J1.B3 J1.B4 J1.D2 J1.F1 J1.F2 J1.F3 J1.F4 J1.G1 J1.H4 J1.J1 J1.M4 J2.C3 J2.D3 J2.E2 J2.E4 J2.G1 J2.G2 J2.G3 J2.G4 J2.H2 J2.J2 J2.M1 J2.M2 J2.M3 J2.M4 J3.2 J3.4 J3.6 J3.8 J3.10 J3.12 J3.14 J3.16 J3.18 J3.20 J3.22 J3.24 J3.26 J3.28 J3.30 J3.32 J3.34 J3.36 J3.38 J3.40 J3.42 J3.44 J3.46 J3.48 J3.50 J3.52 J3.54 J3.56 J3.58 J3.60 J3.62 J3.64 J3.66 J3.68 J3.70 J3.77 J3.78 J3.79 J3.80 J3.81 J3.83 J3.85 J3.92 J3.94 J3.96 J3.98 J3.100 J3.102 J3.104 J3.106 J3.108 J3.110 J3.112 J3.114 J3.116 J3.118 J3.120 J3.122 J3.124 J3.125 J3.126 J3.127 J3.128 J3.129 J3.130 J3.131 J3.132 J3.134 J3.136 J3.138 J3.140 J3.142 J3.144 J3.146 J3.148 J3.150 J3.152 J3.154 J3.156 J3.158 J3.159 J3.160 J3.161 J3.162 J3.163 J3.164 J3.165 J3.166 J3.167 J3.168 J3.169 J3.170 J3.171 J3.172 J3.173 J3.174 J3.175 J3.176 J3.177 J3.178 J3.179 J3.180 J3.181 J3.182 J3.183 J3.184 J3.185 J3.186 J3.187 J3.188 J3.189 J3.190 J3.191 J3.192 J3.193 J3.194 J3.195 J3.196 J3.198 J3.200 J4.P$6 JTAG1.3 JTAG1.4 JTAG1.6 JTAG1.8 JTAG1.10 JTAG1.12 JTAG1.14 JTAG1.16 JTAG1.18 JTAG1.20 Q3.2 R2.2 R5.1 R8.1 R31.1 R55.1 R57.1 R59.1 R66.2 R69.2 R70.2 R71.2 R73.2 U1.4 U2.15 U3.7 U4.11 U5.1 U5.3 U5.6 U5.8 U5.11 U5.13 U6.1 U6.3 U6.6 U6.8 U6.11 U6.13 U7.7 U8.7 U8.12 U9.1 U9.8 U9.14 U10.2 U$1.3 U$1.6 U$1.GP U$19.2 U$24.2 U$30.2 U$33.2 U$34.2 U$37.2 U$39.2 U$40.2 U$43.2 U$45.2 U$47.2 U$49.2 U$55.2 U$57.2 U$59.2 X1.4 X1.14 XB1.10
GND-RELAY: D1.A D3.A J1.K1 R9.2 R10.2
GSENS: J1.A2 R4.2
GSENSO: R33.1 U$24.1 U$24.4
HB1-DIR: U4.6
HB1-DIR-IN: J1.J4 U4.15
HB1-EN: U4.7
HB1-EN-IN: J1.H1 U4.14
HB1-PWM: U4.5
HB1-PWM-IN: J1.J3 U4.16
HB2-DIR: U4.3
HB2-DIR-IN: J1.K4 U4.18
HB2-EN: U4.1
HB2-EN-IN: J1.K3 U4.20
HB2-PWM: U4.4
HB2-PWM-IN: J1.J2 U4.17
IGNCUT: R17.2
IGNCUTO: J2.H1 Q3.3
JTAG_TCK: J3.84 JTAG1.9
JTAG_TDI: J3.86 JTAG1.5
JTAG_TDO: J3.88 JTAG1.13
JTAG_TMS: J3.82 JTAG1.7
MISO: U8.10 X1.12
MOSI: U8.9 U9.15 X1.11
N$1: C7.1 U3.4
N$2: R1.2 R2.1 U3.3
N$3: R9.1
N$4: Q11.1 R32.2
N$5: R26.2 SW1.P$4
N$6: R11.1
N$7: R4.1 R5.2 U$24.3
N$8: R26.1 SW1.P$3
N$9: R10.1
N$10: R14.1
N$11: C34.1 R27.2 R40.2 U5.16
N$12: PTC2.P$2 U1.5 U1.6 U1.7 U1.8
N$13: C12.2 U2.6
N$14: C9.1 U2.4
N$15: C34.2 R39.2 R40.1 U5.15
N$17: C35.1 R41.2 R43.2 U5.9
N$18: C35.2 R42.2 R43.1 U5.10
N$20: C9.2 U2.5
N$21: C8.2 U2.3
N$22: C8.1 U2.1
N$23: C11.1 U2.2
N$24: Q3.1 R17.1
N$28: R44.1 U5.5
N$29: R46.1 U6.5
N$30: R30.2 S2.3
N$31: R45.1 U5.4
N$32: R6.1 R8.2 U$19.3
N$33: R47.1 U6.4
N$34: Q1.1 R24.2
N$35: Q2.1 R25.2
N$36: C36.1 R48.2 R50.2 U6.16
N$37: C14.2 U3.1
N$39: C37.1 R51.2 R53.2 U6.9
N$40: C37.2 R52.2 R53.1 U6.10
N$41: C36.2 R49.2 R50.1 U6.15
N$42: R54.1 R55.2 U8.1
N$43: R30.1 R31.2 U8.2
N$45: C14.1 D2.C L1.P$1 U3.8
N$46: R56.2 S3.3
N$50: C15.2 R66.1
N$53: R56.1 R57.2 U8.3
N$54: C44.1 U7.4
N$57: R54.2 S1.3
N$62: R58.2 S4.3
N$65: R58.1 R59.2 U8.4
N$66: C15.1 C16.1 U3.6
N$71: R67.2 R70.1 U7.3
N$72: R68.2 R69.1 U3.5
N$73: C45.2 U7.1
N$74: C45.1 D8.C L2.P$1 U7.8
N$75: C46.2 R71.1
N$76: C46.1 C47.1 U7.6
N$78: R72.2 R73.1 U7.5
N$79: CN1.ID J3.72
NEUTRAL: J2.J1 R37.2
OC1: R11.2
OC2: R14.2
OILP: J1.C1 S1.2
OILPI: R38.2 S1.1
RESET: J3.90 JTAG1.15
RLY1: D1.C J1.L1
RLY2: D3.C J1.M1
RLY3: J1.L2
RLY4: J1.M2
RLY5: J1.L3
RLY6: J1.M3
RPM1GIN: J2.B4 R42.1
RPM1IN: J2.A4 R41.1
RPM2GIN: J2.B3 R27.1
RPM2IN: J2.A3 R39.1
RPM3GIN: J2.B2 R52.1
RPM3IN: J2.A2 R51.1
RPM4GIN: J2.B1 R48.1
RPM4IN: J2.A1 R49.1
RS232RX: J2.C1 U2.8
RS232TX: J2.C2 U2.7
SCK: U8.11 U9.16 X1.13
SCL: X1.10
SD_IN: J3.73
SDA: X1.9
SDIO_CMD: J3.97 R16.2 U$1.2
SDIO_D0: J3.69 R23.2 U$1.7
SDIO_D1: J3.71 R20.2 U$1.8
SDIO_D2: J3.87 R21.2 U$1.9
SDIO_D3: J3.89 R18.2 U$1.1
SDIO_SCK: J3.91 U$1.5
SPEED: J2.J3 U$33.3
SPEEDB: U$33.1 U$33.4
TRAVEL1: J2.L3 U$30.3
TRAVEL1B: U$30.1 U$30.4
TRAVEL2: J2.L4 U$34.3
TRAVEL2B: U$34.1 U$34.4
TRAVEL3: J2.L2 U$37.3
TRAVEL3B: U$37.1 U$37.4
TRAVEL4: J2.L1 U$40.3
TRAVEL4B: U$40.1 U$40.4
VBUS: CN1.VBUS
VCC: J1.L4 U1.1 U1.2 U1.3
VOUT: J1.H3 U9.6
VTEMP: J2.F1 R13.2 U$45.3
VTEMP2: J2.F3 R12.2 U$47.3
VTEMP2B: U$47.1 U$47.4
VTEMPB: U$45.1 U$45.4
YAW: J1.A3 R6.2
YAWO: R34.1 U$19.1 U$19.4

## Tracks (layer width: path | path; a pad name or v marks a point on that pad's centre or on a via)
3.3V  (via drill 0.38)  (69 unrouted)
  Top 0.305: 25.08,42.74 25.08,42.55 25.5,42.96 J3.197 | 25.08,42.74 J3.197 | J3.197 J3.199 25.08,43.15 25.08,42.74 | C17.1 66.36,141.54 66.36,144.34 R68.1 | U$1.4 71.79,23.72 v71.75,23.69
  Top 0.61: JTAG1.1 JTAG1.2 19.37,35.88 25.08,41.59 25.08,42.55
  Top 1.016: C17.1 C41.1 68.39,136.91 L1.P$2
  Bottom 0.305: R21.1 R18.1 R16.1 v71.75,23.69 R23.1 R20.1
5.0V  (20 unrouted)
  Top 0.305: R72.1 55.24,141.22 C48.1
  Top 1.016: C48.1 C49.1 57.91,136.91 L2.P$2
12V  (2 unrouted)
  Top 0.305: C3.1 66.04,153.03 67.63,151.45 69.22,151.45 70.17,152.4 U3.2 | C43.1 55.56,153.03 56.83,151.76 59.05,151.76 59.69,152.4 U7.2
  Top 1.016: U3.2 70.17,155.77 R1.1 73.09,155.89 | 73.09,155.89 73.34,155.89 73.34,160.02 71.44,161.93 PTC2.P$1 66.36,161.89 66.36,160.97 63.98,158.59 62.71,158.59 62.17,158.05 C42.1 R67.1 59.69,155.77 U7.2 | 73.09,155.89 C2.1
_N  (via drill 0.33)
  Top 0.305: J3.74 62.4,35.94 62.3,36.04 62.3,36.2 arc90 60.64,37.85 57.15,37.85 v57.15,38.04 | v48.95,30 49.14,30 49.14,12.7 arc45 49.05,12.47 CN1.D-
  Bottom 0.305: v48.95,30 49.14,30 49.14,36.35 arc-90 50.64,37.85 57.15,37.85 v57.15,38.04
_P  (via drill 0.33)
  Top 0.305: J3.76 61.8,35.99 61.84,36.04 61.84,36.2 arc90 60.64,37.4 57.15,37.4 v57.15,37.2 | v49.79,30 49.6,30 49.6,24.92 arc90 49.94,24.58 arc-90 50.29,24.24 50.29,24.18 arc-90 49.94,23.84 arc90 49.6,23.5 49.6,23.34 arc90 49.94,22.99 arc-90 50.29,22.65 50.29,22.5 arc-90 49.94,22.16 arc90 49.6,21.82 49.6,12.7 49.66,12.64 arc-45 49.85,12.19 CN1.D+
  Bottom 0.305: v49.79,30 49.6,30 49.6,36.35 arc-90 50.64,37.4 57.15,37.4 v57.15,37.2
AUX2  (1 unrouted)
AUX2I  (1 unrouted)
AUX3  (1 unrouted)
AUX3I  (1 unrouted)
AUX4  (1 unrouted)
AUX4I  (1 unrouted)
BITE  (2 unrouted)
BRAKE-POT  (1 unrouted)
BRAKE-POTB  (1 unrouted)
BRAKEP  (2 unrouted)
BRAKEP2  (2 unrouted)
BRAKEP2B  (1 unrouted)
BRAKEPB  (1 unrouted)
CAN_RX  (1 unrouted)
CAN_TX  (1 unrouted)
CANH  (2 unrouted)
  Top 0.305: SW1.P$5 -19.53,68.42 -19.37,68.26 -19.37,64.14 -19.68,63.82 U10.7
CANL  (2 unrouted)
  Top 0.305: SW1.P$2 -18.57,68.42 -18.73,68.26 -18.73,64.14 -18.41,63.82 U10.6
CLUTCH-POT  (1 unrouted)
CLUTCH-POTB  (1 unrouted)
DBG_RX
  Top 0.305: X1.6 107.47,7.62 J4.P$3
DBG_TX
  Top 0.305: X1.5 108.74,12.06 J4.P$2
ECU1  (2 unrouted)
ECU2  (2 unrouted)
ENCODER1  (2 unrouted)
ENCODER2  (2 unrouted)
FUELTEMP  (2 unrouted)
FUELTEMPB  (1 unrouted)
GEARPOSAN  (1 unrouted)
GEARPOSANB  (1 unrouted)
GND  (6 unrouted)
  pour Top (rank 3): 7.94,5.4 7.94,74.93 7.94,145.1 7.94,165.1 119.06,165.1 119.06,5.4
  pour Bottom: 7.94,5.4 7.94,74.93 7.94,145.1 7.94,165.1 119.06,165.1 119.06,5.4
GND-RELAY  (4 unrouted)
GSENS  (1 unrouted)
GSENSO  (2 unrouted)
HB1-DIR-IN  (1 unrouted)
HB1-EN-IN  (1 unrouted)
HB1-PWM-IN  (1 unrouted)
HB2-DIR-IN  (1 unrouted)
HB2-EN-IN  (1 unrouted)
HB2-PWM-IN  (1 unrouted)
IGNCUTO  (1 unrouted)
JTAG_TCK
  Top 0.305: J3.84 59.4,32.88 57.94,31.43 15.88,31.43 15.56,31.11 15.56,30 14.92,29.37 14.92,27.78 14.13,26.99 12.38,26.99 JTAG1.9
JTAG_TDI
  Top 0.305: J3.86 58.8,33.08 57.63,31.91 15.56,31.91 15.08,31.43 15.08,30.32 14.29,29.53 12.38,29.53 JTAG1.5
JTAG_TDO
  Top 0.305: J3.88 58.2,33.27 57.31,32.38 15.24,32.38 14.92,32.07 10.32,32.07 10,31.75 10,21.75 JTAG1.13
JTAG_TMS  (via drill 0.33)
  Top 0.305: J3.82 59.99,32.69 58.26,30.96 16.19,30.96 16.03,30.8 v16.03,29.53
  Bottom 0.305: v16.03,29.53 12.38,29.53 JTAG1.7
MISO  (1 unrouted)
MOSI  (2 unrouted)
N$1
  Top 0.305: U3.4 67.63,155.45 C7.1
N$2
  Top 0.305: U3.3 68.9,155.77 R1.2 R2.1
N$4  (1 unrouted)
N$5
  Top 0.305: SW1.P$4 -20.2,70.92 -19.84,71.28 -19.84,73.95 R26.2
N$7  (2 unrouted)
N$8
  Top 0.305: SW1.P$3 -17.9,70.92 -18.26,71.28 -18.26,73.95 R26.1
N$11  (3 unrouted)
N$12
  pour Top (no thermals): 58.42,161.93 58.42,160.02 58.74,159.7 61.12,159.7 61.44,160.02 62.71,160.02 63.02,160.34 63.02,163.51 62.71,163.83 61.44,163.83 61.12,164.15 60.48,164.15 58.74,164.15 58.42,163.83
N$13  (1 unrouted)
N$14  (1 unrouted)
N$15  (3 unrouted)
N$17  (3 unrouted)
N$18  (3 unrouted)
N$20  (1 unrouted)
N$21  (1 unrouted)
N$22  (1 unrouted)
N$23  (1 unrouted)
N$24  (1 unrouted)
N$28  (1 unrouted)
N$29  (1 unrouted)
N$30  (1 unrouted)
N$31  (1 unrouted)
N$32  (2 unrouted)
N$33  (1 unrouted)
N$34  (1 unrouted)
N$35  (1 unrouted)
N$36  (3 unrouted)
N$37
  Top 0.305: U3.1 71.44,152.72 72.39,151.76 73.03,151.76 C14.2
N$39  (3 unrouted)
N$40  (3 unrouted)
N$41  (3 unrouted)
N$42  (2 unrouted)
N$43  (2 unrouted)
N$45
  Top 0.305: U3.8 71.44,148.91 72.39,149.86 72.83,149.86 C14.1
  Top 1.016: U3.8 71.44,145.66 D2.C 72,142.49 70.8,141.29 69.72,141.29 L1.P$1
N$46  (1 unrouted)
N$50
  Top 0.305: R66.1 C15.2
N$53  (2 unrouted)
N$54
  Top 0.305: U7.4 57.15,155.45 C44.1
N$57  (1 unrouted)
N$62  (1 unrouted)
N$65  (2 unrouted)
N$66
  Top 0.305: 65.85,150.5 C16.1 | 65.85,150.5 C15.1 | U3.6 68.9,149.86 68.26,150.5 65.85,150.5
N$71
  Top 0.305: U7.3 58.42,155.77 R67.2 R70.1
N$72
  Top 0.305: U3.5 67.58,148.35 R68.2 R69.1
N$73
  Top 0.305: C45.2 61.78,151.57 60.96,152.4 U7.1
N$74
  Top 0.305: C45.1 61.78,150.05 60.96,149.22 U7.8
  Top 1.016: U7.8 60.96,145.66 D8.C 61.52,142.17 60.33,140.97 58.93,140.97 L2.P$1
N$75
  Top 0.305: C46.2 R71.1
N$76
  Top 0.305: 55.37,150.5 C47.1 | 55.37,150.5 C46.1 | U7.6 58.42,149.86 57.78,150.5 55.37,150.5
N$78
  Top 0.305: U7.5 57.15,147.64 56.01,146.49 R72.2 R73.1
N$79  (via drill 0.33)
  Top 0.305: v54.77,36.67 56.83,38.73 57.47,38.73 57.78,38.42 61.44,38.42 62.99,36.86 J3.72 | v50.8,30 50.16,29.37 50.16,25.4 50.8,24.77 50.8,22.07 50.16,21.43 50.16,13.18 50.64,12.7 CN1.ID
  Bottom 0.305: v54.77,36.67 50.8,36.67 50.16,36.04 50.16,30.64 v50.8,30
NEUTRAL  (1 unrouted)
OILP  (1 unrouted)
OILPI  (1 unrouted)
RESET
  Top 0.305: J3.90 57.59,33.47 56.99,32.86 16.03,32.86 14.29,34.61 10.32,34.61 9.53,33.81 9.53,19.68 JTAG1.15
RLY1  (1 unrouted)
RLY2  (1 unrouted)
RPM1GIN  (1 unrouted)
RPM1IN  (1 unrouted)
RPM2GIN  (1 unrouted)
RPM2IN  (1 unrouted)
RPM3GIN  (1 unrouted)
RPM3IN  (1 unrouted)
RPM4GIN  (1 unrouted)
RPM4IN  (1 unrouted)
RS232RX  (1 unrouted)
RS232TX  (1 unrouted)
SCK  (2 unrouted)
SDIO_CMD  (via drill 0.38)
  Top 0.305: v76.83,26.67 76.79,26.71 U$1.2 76.79,32.11 75.09,33.81 75.09,37.31 74.3,38.1 68.58,38.1 67.94,38.73 62.23,38.73 61.59,39.37 58.1,39.37 55.49,41.98 J3.97
  Bottom 0.305: v76.83,26.67 R16.2
SDIO_D0  (via drill 0.38)
  Top 0.305: U$1.7 v64.29,26.67 | J3.69 63.9,41.67 64.29,41.27 v64.29,40.96
  Bottom 0.305: R23.2 v64.29,26.67 64.29,27.59 arc-90 64.64,27.93 65.39,27.93 arc90 65.73,28.27 65.73,28.28 arc90 65.39,28.62 64.64,28.62 arc-90 64.29,28.96 64.29,28.97 arc-90 64.64,29.31 65.39,29.31 arc90 65.73,29.66 65.73,29.66 arc90 65.39,30 64.64,30 arc-90 64.29,30.34 64.29,30.35 arc-90 64.64,30.69 65.39,30.69 arc90 65.73,31.04 65.73,31.04 arc90 65.39,31.38 64.64,31.38 arc-90 64.29,31.73 64.29,31.73 arc-90 64.64,32.07 65.39,32.07 arc90 65.73,32.41 65.73,32.42 arc90 65.39,32.76 64.64,32.76 arc-90 64.29,33.1 64.29,33.11 arc-90 64.64,33.45 65.39,33.45 arc90 65.73,33.8 65.73,33.8 arc90 65.39,34.14 64.64,34.14 arc-90 64.29,34.48 64.29,34.49 arc-90 64.64,34.83 65.39,34.83 arc90 65.73,35.17 65.73,35.18 arc90 65.39,35.52 64.64,35.52 arc-90 64.29,35.87 64.29,35.87 arc-90 64.64,36.21 65.39,36.21 arc90 65.73,36.55 65.73,36.56 arc90 65.39,36.9 64.64,36.9 arc-90 64.29,37.24 64.29,37.25 arc-90 64.64,37.59 65.39,37.59 arc90 65.73,37.94 65.73,37.94 arc90 65.39,38.28 64.64,38.28 arc-90 64.29,38.62 64.29,38.63 arc-90 64.64,38.97 65.39,38.97 arc90 65.73,39.31 65.73,39.32 arc90 65.39,39.66 64.64,39.66 arc-90 64.29,40.01 v64.29,40.96
SDIO_D1  (via drill 0.38)
  Top 0.305: U$1.8 62.69,26.69 v62.71,26.67 | J3.71 63.3,41 v63.34,40.96
  Bottom 0.305: R20.2 v62.71,26.67 63.34,27.3 63.34,27.56 arc90 63,27.91 62.26,27.91 arc-90 61.91,28.25 61.91,28.25 arc-90 62.26,28.6 63,28.6 arc90 63.34,28.94 63.34,28.95 arc90 63,29.29 62.26,29.29 arc-90 61.91,29.63 61.91,29.64 arc-90 62.26,29.98 63,29.98 arc90 63.34,30.32 63.34,30.33 arc90 63,30.67 62.26,30.67 arc-90 61.91,31.02 61.91,31.02 arc-90 62.26,31.36 63,31.36 arc90 63.34,31.71 63.34,31.71 arc90 63,32.05 62.26,32.05 arc-90 61.91,32.4 61.91,32.4 arc-90 62.26,32.75 63,32.75 arc90 63.34,33.09 63.34,33.09 arc90 63,33.44 62.26,33.44 arc-90 61.91,33.78 61.91,33.79 arc-90 62.26,34.13 63,34.13 arc90 63.34,34.47 63.34,34.48 arc90 63,34.82 62.26,34.82 arc-90 61.91,35.16 61.91,35.17 arc-90 62.26,35.51 63,35.51 arc90 63.34,35.86 63.34,35.86 arc90 63,36.2 62.26,36.2 arc-90 61.91,36.55 61.91,36.55 arc-90 62.26,36.9 63,36.9 arc90 63.34,37.24 63.34,37.24 arc90 63,37.59 62.26,37.59 arc-90 61.91,37.93 61.91,37.94 arc-90 62.26,38.28 63,38.28 arc90 63.34,38.62 63.34,38.63 arc90 63,38.97 62.26,38.97 arc-90 61.91,39.31 61.91,39.32 arc-90 62.26,39.66 63,39.66 arc90 63.34,40.01 v63.34,40.96
SDIO_D2  (via drill 0.38)
  Top 0.305: U$1.9 81.79,28.61 80.33,27.15 v80.33,26.67 | J3.87 58.49,41.36 59.05,40.8 62.55,40.8 63.18,40.16 78.58,40.16 v80.33,38.42
  Bottom 0.305: R21.2 v80.33,26.67 v80.33,38.42
SDIO_D3  (via drill 0.38)
  Top 0.305: U$1.1 79.29,27.22 v78.74,26.67 | v78.74,38.42 77.47,39.69 62.87,39.69 62.23,40.32 58.74,40.32 57.9,41.16 J3.89
  Bottom 0.305: R18.2 v78.74,26.67 78.74,27.38 arc-90 79.08,27.72 79.32,27.72 arc90 79.66,28.07 79.66,28.21 arc90 79.32,28.55 79.08,28.55 arc-90 78.74,28.89 v78.74,38.42
SDIO_SCK  (via drill 0.38)
  Top 0.305: U$1.5 69.29,32.63 v69.22,32.7 | v68.9,38.89 68.58,39.21 62.55,39.21 61.91,39.85 58.42,39.85 57.3,40.97 J3.91
  Bottom 0.305: v68.9,38.89 69.22,38.58 69.22,38.1 arc90 69.56,37.76 70.84,37.76 arc-90 71.18,37.41 71.18,37.28 arc-90 70.84,36.94 67.59,36.94 arc90 67.25,36.6 67.25,36.47 arc90 67.59,36.13 70.84,36.13 arc-90 71.18,35.78 71.18,35.66 arc-90 70.84,35.31 67.59,35.31 arc90 67.25,34.97 67.25,34.84 arc90 67.59,34.5 70.84,34.5 arc-90 71.18,34.16 71.18,34.03 arc-90 70.84,33.68 69.56,33.68 arc90 69.22,33.34 v69.22,32.7
SPEED  (1 unrouted)
SPEEDB  (1 unrouted)
TRAVEL1  (1 unrouted)
TRAVEL1B  (1 unrouted)
TRAVEL2  (1 unrouted)
TRAVEL2B  (1 unrouted)
TRAVEL3  (1 unrouted)
TRAVEL3B  (1 unrouted)
TRAVEL4  (1 unrouted)
TRAVEL4B  (1 unrouted)
VCC
  Top 1.27: J1.L4 19.07,157.18 23.81,161.93 54.61,161.93
  pour Top (rank 2, no thermals): 53.66,161.13 55.4,161.13 55.4,163.99 53.66,163.99
VOUT  (1 unrouted)
VTEMP  (2 unrouted)
VTEMP2  (2 unrouted)
VTEMP2B  (1 unrouted)
VTEMPB  (1 unrouted)
YAW  (1 unrouted)
YAWO  (2 unrouted)

## Text on the board
tNames: Connector 2 | Connector 1
tSilk: 5V | 12V | 3,3V | + | AUX POWER | + | INT | INT | INT | INT | ADC | ADC | ADC | ADC | Communication & / Traction Control Unit / Version 1